# Altium PCB cjb.PcbDoc (part 2 of 2)
Units mil, origin at the board's own origin, x right, y up, seen from the top; angles counter-clockwise.
Board outline 3937.01 x 3672.01 mil, 2 copper layers (Top Layer, Bottom Layer), stack 62.8 mil thick; 137 components, 97 nets, 411 pads, 153 vias.
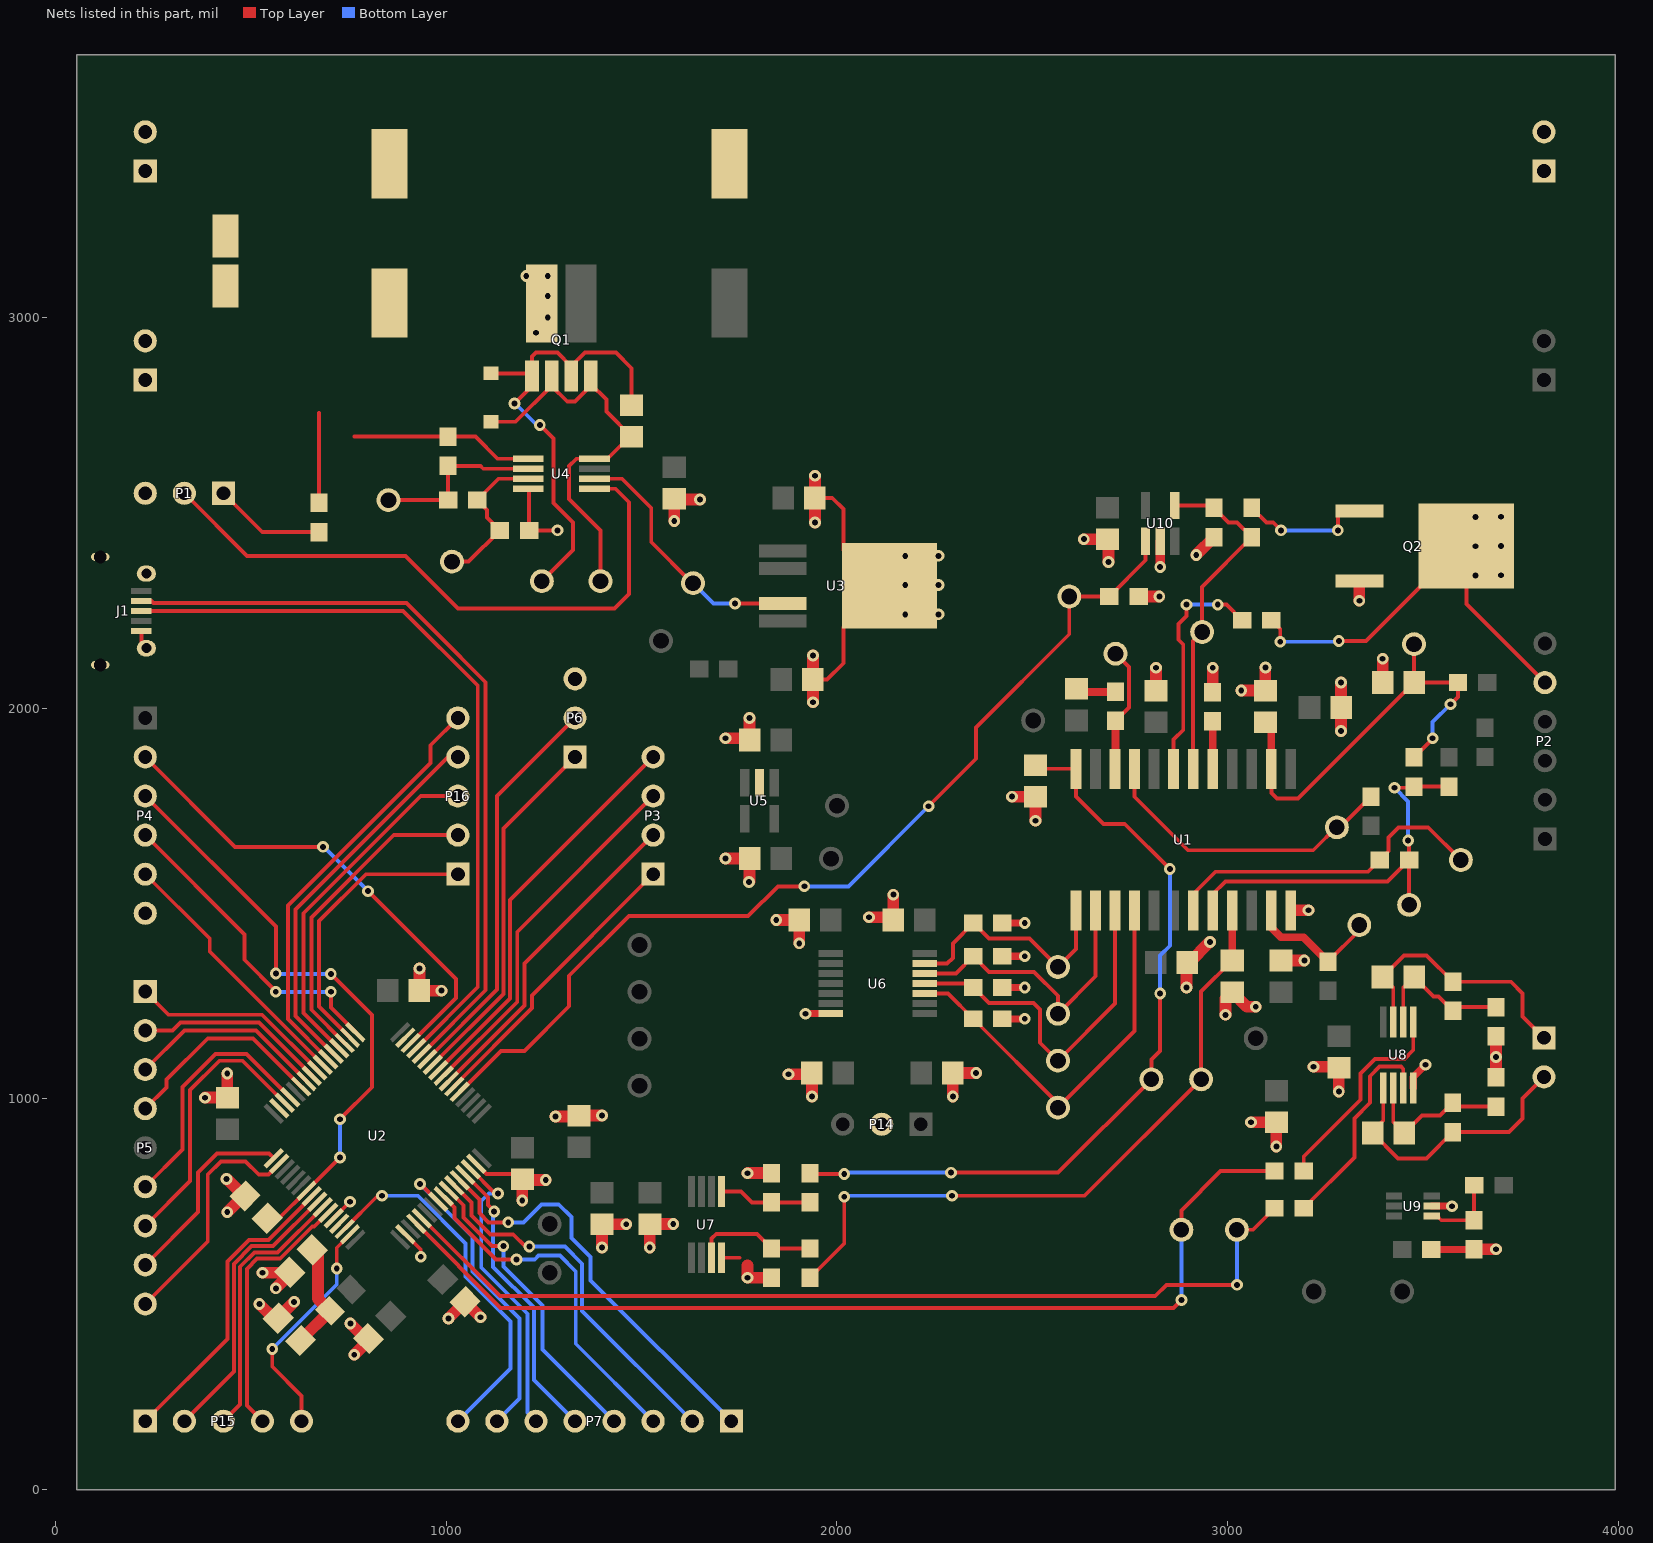
[diagram p2: the nets of this part, all layers, seen from the top]

## Via types
v1: diameter 30, hole 15, Top Layer to Bottom Layer, 153 vias

## Nets (pads, with @x,y where several pads share a name; then routed paths per layer and width w, separated by ;. In a path a pad name is that pad's centre, name@x,y a point inside that pad or via, vN(x,y) a via of type N, cw(c..) or ccw(c..) an arc to the next point about the centre after c; other vN are vias at no path point) (continued)
DAC_OUT1: R32.1 TP21.1 U2.20 | length 2565.2
  Top Layer w10: U2.20@923.83,680.9 1139.73,465 2862,465 v1(2882,485) ; TP21.1@2882,665 2882,714.5 2982.5,815 R32.1@3120.2,815
  Bottom Layer w10: v1(2882,485) TP21.1@2882,665
DAC_OUT2: R35.1 TP22.1 U2.21 | length 2441
  Top Layer w10: U2.21@937.75,694.82 1137.56,495 2815,495 2844,524 v1(3024,524) ; TP22.1@3024,665 3065.2,665 R35.1@3120.2,720
  Bottom Layer w10: v1(3024,524) TP22.1@3024,665
GND: C1.1 C2.2 C3.2 C5.2 C6.1 C7.1 C8.1 C9.1 C10.1 C11.1 C12.1 C13.1 C14.1 C15.1 C16.1 C17.2 C18.2 C19.2 C20.1 C22.1 C23.1 C24.1 C25.1 C26.2 C27.1 C28.1 C29.1 C30.1 C33.1 C34.1 C35.1 C36.1 C37.1 D1.1 J1.5 J1.6 J1.7 J1.8 J1.9 P1.3 P4.6 P6.3 P11.1 P11.2 P13.1 P13.2 P14.2 Q2.3 R1.2 R2.2 R3.2 R4.2 R9.2 R12.2 R20.2 R21.1 R23.1 R25.1 R27.1 R29.1 R31.1 R34.1 U1.24 U2.12 U2.18 U2.31 U2.47 U2.63 U3.6 U4.4 U5.2 U6.7 U7.4 U8.4 U9.2 U10.2 | length 5824.7
  Top Layer w10: J1.5@220,2197.64 220,2166.14 J1.7@232.8,2153.35 ; U2.12@712.25,694.82 v1(754.01,736.57) ; U2.18@895.99,653.06 935,614.05 v1(935,596) ; U2.31@1076.94,834.01 1103.45,807.51 1182.14,807.51 C15.1@1195,794.65 ; U4.4@1210.35,2561.61 1212.4,2559.57 R20.2@1212.4,2455 v1(1285,2455) ; U7.4@1704.74,593.36 1751.64,593.36 ; C23.1@1771.65,1923 C23.1@1776.65,1918 ; v1(1775,1555) v1@1776.65,1556.65 ; C17.2@1938.92,2073 1975,2073 2016.92,2114.92 2016.92,2206.92 U3.6@2105,2295 ; C20.1@1943.92,2538 1988.4,2538 2016.92,2509.48 U3.6@2016.92,2405 ; C2.2@2897.42,1348.8 C2.2@2902.06,1348.8 ; v1@3096.71,2103.45 v1(3097.06,2103.8)
  Top Layer w18: v1@1920.43,1218.23 U6.7@1984.92,1218.23 ; R4.2@2423.9,1205 v1(2481,1205) ; R3.2@2423.9,1285 v1(2481,1285) ; R2.2@2423.9,1365 v1(2481,1365) ; R1.2@2423.9,1450 v1(2481,1450) ; C30.1@3124.65,940 C30.1@3125,939.65 ; C29.1@3282.3,1082.34 C29.1@3285,1079.65 ; Q2.3@3337.33,2324.89 Q2.3@3337.68,2325.24 ; U8.4@3475.36,1027.7 3475.36,1055.73 v1(3506.98,1087.34) ; R12.2@3521.73,614.6 R12.2@3534.72,614.6 ; R12.2@3521.73,627.59 R12.2@3534.72,614.6 ; U9.2@3522.56,725.33 3574.02,725.33 v1(3574.33,725.02) ; R23.1@3630.66,614.6 R12.2@3534.72,614.6
  Top Layer w20: C22.1@1584,2535.65 C22.1@1585.65,2534
  Top Layer w24: v1(2827.61,2361.05) U10.2@2827.61,2426.85
  Top Layer w30: v1(383,1003) 383.35,1003.35 C13.1@440,1003.35 v1(440,1065) ; v1(437.69,795) 438.07,795 481.53,751.53 v1(440,710) ; v1(522,475) 558.47,438.53 C16.1@570.2,438.53 570.2,439.67 v1(611,480.47) ; v1(530,555) 598.74,555 601.5,552.24 v1(564.26,515) ; v1(755,425) 800,380 v1(765,345) ; v1(931.85,1333.85) C14.1@931.85,1277 v1(988.4,1277) ; v1(1006.07,438) C12.1@1048.53,480.47 v1(1088,441) ; v1(1195,740) C15.1@1195,794.65 1197.39,792.25 v1(1255,792.25) ; v1(1280,955) 1337.65,955 C10.1@1340,957.35 v1(1399,957.35) ; v1(1399,619.57) C34.1@1399,679.22 v1(1460.99,679.22) ; v1(1521.35,619.57) C33.1@1521.35,679.22 1521.71,679.57 v1(1581.35,679.57) ; v1(1584,2479) C22.1@1584,2535.65 ; C22.1@1585.65,2534 v1(1650,2534) ; v1(1715,1615) C24.1@1776.65,1615 v1@1776.65,1556.65 ; v1(1715,1923) C23.1@1771.65,1923 ; 1771.35,573.65 v1(1771.35,542.17) R27.1@1832.92,542.17 ; v1(1771.35,809.57) 1771.76,809.98 R25.1@1832.92,809.98 ; C23.1@1776.65,1918 v1(1776.65,1975) ; v1(1845,1458) C27.1@1903.57,1458 1904,1457.57 v1(1904,1398) ; v1(1876.57,1063.05) C35.1@1933,1063.05 ; v1(1936.21,1006.26) C35.1@1936.21,1059.84 ; v1(1938.92,2015) C17.2@1938.92,2073 v1(1938.92,2135) ; v1(1943.92,2475) C20.1@1943.92,2538 v1(1943.92,2595) ; v1(2082.45,1465) 2143.62,1465 2144.65,1466.02 v1(2144.65,1522.65) ; v1(2296.92,1006.26) C25.1@2296.92,1066.26 v1(2356.57,1066.26) ; v1(2448.33,1773.45) C7.1@2508.33,1773.45 v1(2508.33,1711.8) ; v1(2632.21,2432.5) C37.1@2692.61,2432.5 2695.45,2429.67 v1(2695.45,2373.85) ; R21.1@2772.32,2285.84 v1(2825.57,2285.84) ; C5.2@2817.06,2044.16 v1(2817.06,2103.45) ; v1(2895,1284.79) 2895,1346.39 C2.2@2897.42,1348.8 ; C2.2@2902.06,1348.8 v1(2955,1401.74) ; v1(2920,2392.24) R29.1@2965.35,2437.6 ; R9.2@2962.06,2041.2 v1(2962.06,2103.45) ; v1(2995,1215) 2995,1256.39 C6.1@3012.06,1273.45 3049.71,1235.8 v1(3072.06,1235.8) ; v1(3035,2045) 3095.87,2045 C3.2@3096.71,2044.16 v1@3096.71,2103.45 ; v1(3060,940) C30.1@3124.65,940 ; v1(3125,878) C30.1@3125,939.65 ; C8.1@3137.06,1354.16 v1(3196.71,1354.16) ; U1.24@3171,1482.7 v1(3207.06,1482.7) ; v1(3220,1082.34) C29.1@3282.3,1082.34 ; v1(3285,1019) C29.1@3285,1079.65 ; v1(3290.48,1941.4) C1.1@3290.48,2001.4 v1(3290.48,2065.4) ; v1(3337.33,2275) Q2.3@3337.33,2324.89 ; C26.2@3396.98,2065.4 v1(3396.98,2126.4) ; R23.1@3630.66,614.6 3631.06,615 v1(3686.98,615) ; R34.1@3686.98,1054.75 v1(3686.98,1107.34) R31.1@3686.98,1159.94
  other v1: 1920,1217.8 2175,2240.12 2260,2240.12 2175,2315 2260,2315 2175,2389.88 2260,2389.88
HEATER-: P2.5 Q2.4 R14.1 | length 1061
  Top Layer w10: R14.1@3112.4,2225 3135,2202.4 v1(3135,2170) ; v1(3285,2172.06) 3354.39,2172.06 Q2.4@3597.33,2415 ; Q2.4@3611.3,2415 3611.3,2266.43 P2.5@3812.33,2065.4
  Bottom Layer w10: v1(3135,2170) 3282.94,2170 v1(3285,2172.06)
  other v1: 3635,2339.56 3700,2340.12 3635,2414.45 3700,2415 3635,2489.33 3700,2489.88
NetC3_1: C3.1 C26.1 R10.1 R22.2 TP26.1 U1.2 | length 1130.7
  Top Layer w10: C3.1@3096.71,1963.45 C3.1@3112.06,1948.09 ; U1.2@3112.06,1844.91 3112.06,1782.67 3126.33,1768.4 3180.68,1768.4 C26.1@3477.68,2065.4 ; R10.1@3477.33,1873.8 3525,1921.47 v1(3525,1923) ; TP26.1@3477.33,2163.8 3477.68,2163.45 C26.1@3477.68,2065.4 ; v1(3570.93,2010) 3589.93,2029 R22.2@3589.93,2065.4 C26.1@3477.68,2065.4
  Top Layer w20: U1.2@3112.06,1844.91 C3.1@3112.06,1948.09
  Bottom Layer w10: v1(3525,1923) 3525,1964.07 v1(3570.93,2010)
NetC4_2: C4.2 R5.1 | length 96.6
  Top Layer w20: C4.2@2626.74,2041.2 R5.1@2723.33,2041.2
NetC21_1: C21.1 D2.2 Q1.2 Q1.4 TP32.1 U4.8 | length 1049.5
  Top Layer w10: D2.2@1115,2732.99 1177.99,2732.99 1270,2825 1310,2785 1330,2785 1370,2825 Q1.4@1370,2830 ; Q1.4@1370,2850.35 Q1.4@1370,2830 ; TP32.1@1395,2325 1395,2455 1315,2535 1315,2620 1333.39,2638.39 U4.8@1379.65,2638.39 1413.39,2638.39 1469.65,2694.65 C21.1@1475,2694.65 1410,2759.65 1410,2790 Q1.4@1370,2830
NetC21_2: C21.2 D2.1 Q1.1 Q1.3 TP31.1 | length 1226.5
  Top Layer w10: D2.1@1115,2857.01 1213.35,2857.01 Q1.1@1220,2850.35 ; v1(1175,2780) 1220,2825 Q1.1@1220,2850.35 ; v1(1240,2725) 1275,2690 1275,2525 1325,2475 1325,2405 TP31.1@1245,2325 ; Q1.3@1320,2850.35 Q1.3@1320,2875 ; C21.2@1475,2775.35 1475,2870 1435,2910 1355,2910 Q1.3@1320,2875 ; Q1.1@1220,2850.35 1220,2900 1230,2910 1285,2910 Q1.3@1320,2875
  Bottom Layer w10: v1(1175,2780) 1177.01,2780 1232.01,2725 v1(1240,2725)
NetC31_1: C31.1 R30.1 R31.2 U8.6 | length 376.7
  Top Layer w10: U8.6@3449.77,1196.99 3449.77,1284.79 C31.1@3477.33,1312.34 3527.33,1262.34 3539.57,1262.34 R30.1@3576.98,1224.94 3586.78,1234.75 R31.2@3686.98,1234.75
NetC31_2: C31.2 P8.1 R30.2 U8.7 | length 684.8
  Top Layer w10: U8.7@3424.18,1196.99 3424.18,1284.79 C31.2@3396.62,1312.34 3451.62,1367.34 3509.38,1367.34 R30.2@3576.98,1299.75 3725.25,1299.75 3755,1270 3755,1211.26 P8.1@3810,1156.26
NetC32_1: C32.1 R33.1 R34.2 U8.2 | length 397.8
  Top Layer w10: U8.2@3424.18,1027.7 3424.18,940.49 C32.1@3452.33,912.34 3497.33,957.34 3543.95,957.34 R33.1@3576.35,989.75 3586.16,979.94 R34.2@3686.98,979.94
NetC32_2: C32.2 P8.2 R33.2 U8.1 | length 710.5
  Top Layer w10: C32.2@3366.62,912.34 3398.59,944.31 U8.1@3398.59,1027.7 ; C32.2@3371.62,912.34 3436.62,847.34 3508.76,847.34 R33.2@3576.35,914.94 3719.94,914.94 3755,950 3755,1001.26 P8.2@3810,1056.26
NetP1_1: P1.1 R17.1 | length 286.2
  Top Layer w10: P1.1@430,2550 529.45,2450.55 R17.1@675,2450.55
NetP1_2: P1.2 U4.5 | length 1613.1
  Top Layer w10: P1.2@330,2550 490.12,2389.88 895.99,2389.88 1030.87,2255 1430.79,2255 1468,2292.21 1468,2527 1433.39,2561.61 U4.5@1379.65,2561.61
NetQ2_1: Q2.1 R28.2 | length 343.4
  Top Layer w10: R28.2@3062.06,2512.4 3099.46,2475 3117.06,2475 v1(3137.06,2455) ; v1(3282.33,2455) 3282.33,2494.98 3292.12,2504.76 Q2.1@3337.68,2504.76
  Bottom Layer w10: v1(3137.06,2455) v1(3282.33,2455)
NetR1_1: R1.1 TP12.1 U1.13 U6.13 | length 616.3
  Top Layer w10: U6.13@2225.08,1346.18 2282.38,1346.18 2296.92,1360.72 2296.92,1397.82 R1.1@2349.1,1450 2389.1,1410 2493.67,1410 TP12.1@2566,1337.67 2612.06,1383.73 U1.13@2612.06,1482.7
NetR2_1: R2.1 TP13.1 U1.14 U6.12 | length 752.3
  Top Layer w10: U6.12@2225.08,1320.59 2304.69,1320.59 R2.1@2349.1,1365 2389.1,1325 2505,1325 2566,1264 TP13.1@2566,1217.67 2662.06,1313.73 U1.14@2662.06,1482.7
NetR3_1: R3.1 TP14.1 U1.15 U6.11 | length 926.7
  Top Layer w10: U6.11@2225.08,1295 2339.1,1295 R3.1@2349.1,1285 2389.1,1245 2503.33,1245 2520,1228.33 2520,1143.67 TP14.1@2566,1097.67 2712.06,1243.73 U1.15@2712.06,1482.7 ; TP14.1@2570.8,1092.87 TP14.1@2570.8,1101.8
NetR4_1: R4.1 TP15.1 U1.16 U6.10 | length 1064.1
  Top Layer w10: U6.10@2225.08,1269.41 2284.69,1269.41 R4.1@2349.1,1205 2566,988.1 TP15.1@2566,977.67 2762.06,1173.73 U1.16@2762.06,1482.7 U1.16@2762.06,1492.7
NetR6_2: R6.2 TP25.1 U1.9 | length 793
  Top Layer w10: U1.9@2762.06,1844.91 2762.06,1773.17 2898.83,1636.4 3219.33,1636.4 3282.33,1699.4 3292.93,1699.4 R6.2@3367.33,1773.8 ; TP25.1@3282.33,1686.4 TP25.1@3282.33,1688.8
NetR7_2: R7.2 R8.1 R10.2 TP27.1 U1.20 | length 1026.6
  Top Layer w10: U1.20@2962.06,1492.7 2962.06,1523.8 2994.66,1556.4 3409.73,1556.4 R8.1@3464.73,1611.4 ; v1(3427.33,1796.4) 3474.73,1796.4 R10.2@3477.33,1799 R7.2@3567.33,1799 ; v1(3462.33,1661.4) 3464.73,1659 R8.1@3464.73,1611.4 ; TP27.1@3464.73,1496.4 R8.1@3464.73,1611.4
  Bottom Layer w10: v1(3427.33,1796.4) 3462.33,1761.4 v1(3462.33,1661.4)
NetR8_2: R8.2 TP28.1 U1.19 | length 842.7
  Top Layer w10: U1.19@2912.06,1492.7 2912.06,1523.8 2969.66,1581.4 3359.93,1581.4 R8.2@3389.93,1611.4 3412.33,1633.8 3412.33,1669.4 3437.83,1694.9 3513.83,1694.9 TP28.1@3597.33,1611.4
NetR9_1: R9.1 U1.5 | length 121.5
  Top Layer w20: U1.5@2962.06,1844.91 R9.1@2962.06,1966.4
NetR13_2: R13.2 R23.2 U9.1 | length 202.4
  Top Layer w10: U9.1@3522.56,699.74 3536.59,699.74 3546.93,689.4 R23.2@3630.66,689.4 3630.66,777.64 R13.2@3631.93,778.91
NetR14_2: R14.2 U1.7 | length 602.5
  Top Layer w10: U1.7@2862.06,1844.91 2862.06,1919.29 2886.61,1943.84 2886.61,2163.39 2875,2175 2875,2215.35 2895,2235.35 v1(2895,2265) ; v1(2975,2265) 2997.6,2265 R14.2@3037.6,2225
  Bottom Layer w10: v1(2895,2265) v1(2975,2265)
NetR18_2: R18.2 R19.1 TP5.1 U4.2 | length 448.8
  Top Layer w10: TP5.1@852.4,2532.4 1004.65,2532.4 R18.2@1004.65,2620.2 1087.6,2620.2 1095,2612.8 U4.2@1210.35,2612.8
NetR19_2: R19.2 R20.1 TP7.1 U4.3 | length 410.3
  Top Layer w10: TP7.1@1015,2375 1057.6,2375 R20.1@1137.6,2455 1104.65,2487.95 1104.65,2507.56 R19.2@1079.8,2532.4 1134.61,2587.2 U4.3@1210.35,2587.2
NetR24_2: R24.2 R25.2 U7.5 | length 238
  Top Layer w10: U7.5@1704.74,762.65 1755.28,762.65 1782.76,735.17 R25.2@1832.92,735.17 R24.2@1931.35,735.17
NetR26_2: R26.2 R27.2 U7.3 | length 328.8
  Top Layer w10: U7.3@1679.15,593.36 1679.15,642.37 1691.35,654.57 1795.32,654.57 R27.2@1832.92,616.98 R26.2@1931.35,616.98 R26.2@1938.28,616.98
NetR32_2: R32.2 U8.5 | length 542.4
  Top Layer w10: R32.2@3195,815 3195,852.67 3340,997.67 3340,1065 3377.34,1102.34 3452.98,1102.34 3475.36,1124.73 U8.5@3475.36,1196.99
NetR35_2: R35.2 U8.3 | length 559.7
  Top Layer w10: R35.2@3192.5,722.5 R35.2@3197.5,722.5 ; R35.2@3195,720 R35.2@3197.5,722.5 ; U8.3@3449.77,1027.7 3449.77,1076.95 3444.38,1082.34 3389.45,1082.34 3365,1057.89 3365,990 3325,950 3325,850 R35.2@3197.5,722.5
NetTP4_1: TP4.1 U3.4 U4.6 | length 666.8
  Top Layer w10: U4.6@1379.65,2587.2 1450.2,2587.2 1525,2512.4 1525,2425 1626.79,2323.21 TP4.1@1635.21,2323.21 ; v1(1739.2,2268.12) U3.4@1861.24,2268.12
  Bottom Layer w10: TP4.1@1632,2320 1683.88,2268.12 v1(1739.2,2268.12)
NRST: C9.2 P4.3 U2.7 | length 1531
  Top Layer w10: P4.3@230,1775 564.26,1440.74 v1(564.26,1320.59) ; C9.2@542.53,694.47 572.71,694.47 U2.7@642.66,764.41 v1(728.25,850.01) ; v1(705,1319.5) 810,1214.5 810,1029.75 v1(728.25,948)
  Bottom Layer w10: v1(564.26,1320.59) 565.35,1319.5 v1(705,1319.5) ; v1(728.25,850.01) v1(728.25,948)
PA0: P7.8 U2.14 | length 954.2
  Top Layer w10: U2.14@740.09,666.98 825.11,752 v1(835.75,752)
  Bottom Layer w10: v1(835.75,752) 928,752 1050,630 1050,544.81 1165,429.81 1165,310 P7.8@1030,175
PA1: P15.5 U2.15 | length 591.6
  Top Layer w10: v1(555,360) 555,315 630,240 P15.5@630,175 ; v1(720,566) 720,619.05 U2.15@754.01,653.06
  Bottom Layer w10: v1(555,360) 720,525 v1(720,566)
PA8: P3.4 U2.41 | length 1030.3
  Top Layer w10: U2.41@979.51,1073.43 980.78,1073.43 1163.79,1256.43 1163.79,1508.79 P3.4@1530,1875
PA15: P16.1 U2.50 | length 735.5
  Top Layer w10: U2.50@754.01,1156.94 675,1235.95 675,1455 795,1575 P16.1@1030,1575
PB0: P7.4 U2.26 | length 781.8
  Top Layer w10: U2.26@1007.34,764.41 1044,727.76 1044,696 1117,623 v1(1146.54,623)
  Bottom Layer w10: v1(1146.54,623) 1146.54,570.71 1246.59,470.66 1246.59,358.41 P7.4@1430,175
PB1: P7.2 U2.27 | length 948.6
  Top Layer w10: U2.27@1021.26,778.33 1065,734.6 1065,702 1113.94,653.06 1171.94,653.06 1203,622 v1(1213,622)
  Bottom Layer w10: v1(1213,622) 1303.98,622 1348,577.98 1348,457 P7.2@1630,175
PB2: P7.1 U2.28 | length 1083.8
  Top Layer w10: U2.28@1035.18,792.25 1085,742.44 1085,708 1109,684 v1(1159,684)
  Bottom Layer w10: v1@1155.13,679.13 v1@1155.13,687.87 ; v1(1159,684) 1197.94,684 1243.94,730 1288.2,730 1320.64,697.56 1320.64,644.22 1370,594.86 1370,535 P7.1@1730,175
PB4: P5.1 U2.56 | length 524
  Top Layer w10: P5.1@230,1275 289.63,1215.37 528.55,1215.37 U2.56@670.49,1073.43
PB5: P5.2 U2.57 | length 491
  Top Layer w10: P5.2@230,1175 300,1175 320,1195 521.08,1195 U2.57@656.57,1059.51
PB6: P5.3 U2.58 | length 507.7
  Top Layer w10: P5.3@230,1075 330,1175 513.24,1175 U2.58@642.66,1045.59
PB7: P5.4 U2.59 | length 536.1
  Top Layer w10: P5.4@230,975 284.46,1029.46 284.46,1049.46 390,1155 505.4,1155 U2.59@628.74,1031.67
PB8: P5.6 U2.61 | length 651.7
  Top Layer w10: P5.6@230,775 325,870 325,1030 410.18,1115.18 489.54,1115.18 U2.61@600.9,1003.83
PB9: P5.7 U2.62 | length 712.9
  Top Layer w10: P5.7@230,675 345,790 345,1022.51 420.16,1097.67 479.22,1097.67 U2.62@586.98,989.91
PB10: P7.5 U2.29 | length 749.6
  Top Layer w10: U2.29@1049.1,806.17 1107,748.27 1107,728 v1(1123,712)
  Bottom Layer w10: v1(1123,712) 1120.54,709.54 1120.54,569.96 1225,465.5 1225,280 P7.5@1330,175
PB11: P7.6 U2.30 | length 768.3
  Top Layer w10: U2.30@1063.02,820.09 1125.11,758 v1(1133,758)
  Bottom Layer w10: v1(1133,758) 1109.43,758 1090,738.57 1090,567.96 1207.96,450 1207.96,197.04 P7.6@1230,175
PC0: P15.1 U2.8 | length 781.3
  Top Layer w10: P15.1@230,175 440,385 440,583.63 495.51,639.14 545.22,639.14 U2.8@656.57,750.49
PC1: P15.2 U2.9 | length 734.8
  Top Layer w10: P15.2@330,175 456.74,301.74 456.74,577.74 502,623 556.92,623 U2.9@670.49,736.57
PC2: P15.3 U2.10 | length 687.8
  Top Layer w10: P15.3@430,175 472.74,217.74 472.74,570.37 509.37,607 568.76,607 U2.10@684.41,722.66
PC3: P15.4 U2.11 | length 674.4
  Top Layer w10: P15.4@530,175 490,215 490,565 516,591 575.39,591 657.39,673 662.6,673 U2.11@698.33,708.74
PC4: P7.7 U2.24 | length 802.1
  Top Layer w10: v1(933,782) 934.08,782 U2.24@979.51,736.57
  Bottom Layer w10: v1(933,782) 1067.93,647.07 1067.93,558.07 1188.19,437.81 1188.19,233.19 P7.7@1130,175
PC5: P7.3 U2.25 | length 907.4
  Top Layer w10: U2.25@993.42,750.49 1022,721.92 1022,695 1128,589 v1(1180,589)
  Bottom Layer w10: v1(1180,589) 1226.81,589 1236.81,599 1291,599 1331.86,558.14 1331.86,373.14 P7.3@1530,175
PC7: P3.1 U2.38 | length 754.1
  Top Layer w10: U2.38@1021.26,1031.67 1021.26,1033.54 1220,1232.28 1220,1265 P3.1@1530,1575
PC8: P3.2 U2.39 | length 845.9
  Top Layer w10: U2.39@1007.34,1045.59 1201.01,1239.25 1201.01,1346.01 P3.2@1530,1675
PC9: P3.3 U2.40 | length 937.8
  Top Layer w10: U2.40@993.42,1059.51 1182.14,1248.22 1182.14,1427.14 P3.3@1530,1775
PC10: P16.2 U2.51 | length 818.7
  Top Layer w10: U2.51@740.09,1143.02 655,1228.11 655,1464.06 865.94,1675 P16.2@1030,1675
PC11: P16.3 U2.52 | length 902.9
  Top Layer w10: U2.52@726.17,1129.1 635,1220.27 635,1475 935,1775 P16.3@1030,1775
PC12: P16.4 U2.53 | length 979.3
  Top Layer w10: U2.53@712.25,1115.18 615,1212.44 615,1485 P16.4@1017.5,1887.5
PC13: P5.9 U2.2 | length 620
  Top Layer w10: P5.9@230,475 390,635 390,806.12 423.88,840 486.74,840 520.57,806.17 545.22,806.17 U2.2@573.06,834.01
PD2: P16.5 U2.54 | length 1096.7
  Top Layer w10: U2.54@698.33,1101.26 595,1204.6 595,1495 960,1860 960,1905 P16.5@1030,1975
PWM_DRIVE: R28.1 R29.2 TP20.1 U1.6 U10.4 | length 885.5
  Top Layer w10: U10.4@2865.02,2518.85 2958.9,2518.85 R29.2@2965.35,2512.4 3002.76,2475 3024.66,2475 R28.1@3062.06,2437.6 2935,2310.54 TP20.1@2935,2195 2912.06,2172.06 U1.6@2912.06,1844.91
PWM_EN: R21.2 TP1.1 U2.37 U10.1 | length 2516.3
  Top Layer w10: U2.37@1035.18,1017.75 1072.18,1054.75 1072.4,1054.75 1140.66,1123 1201.01,1123 1315,1236.99 1315,1315 1468,1468 1773,1468 1849,1544 v1(1917,1544) ; v1(2235,1749) 2356.57,1870.57 2356.57,1950.72 2595,2189.16 TP1.1@2595,2285.84 R21.2@2697.52,2285.84 2790.21,2378.54 U10.1@2790.21,2426.85
  Bottom Layer w10: v1(1917,1544) 2030,1544 v1(2235,1749)
RF: R15.1 TP29.1 U1.23 | length 352.2
  Top Layer w10: U1.23@3112.06,1438.8 U1.23@3112.06,1482.7 ; R15.1@3257.06,1351.2 3337.33,1431.47 TP29.1@3337.33,1445
  Top Layer w20: U1.23@3112.06,1438.8 3137.06,1413.8 3194.46,1413.8 R15.1@3257.06,1351.2
RM: R5.2 TP24.1 U1.10 | length 323.1
  Top Layer w10: U1.10@2712.06,1844.91 2712.06,1888.8 U1.10@2713.33,1890.07 ; R5.2@2713.33,1967.24 2747.33,2001.24 2747.33,2105.28 TP24.1@2713.33,2139.28
  Top Layer w20: U1.10@2713.33,1890.07 R5.2@2713.33,1967.24
SWCLK: P4.4 U2.49 | length 809
  Top Layer w10: P4.4@230,1675 484,1421 484,1356 v1@565,1275 ; v1(705,1274) 705,1233.79 U2.49@767.93,1170.86
  Bottom Layer w10: v1(564,1274) v1(705,1274)
SWDIO: P4.2 U2.46 | length 1242.5
  Top Layer w10: P4.2@230,1875 460,1645 v1(685,1645) ; v1(800,1531.72) 1025,1306.72 1025,1258.11 U2.46@909.91,1143.02
  Bottom Layer w10: v1@685,1646.72 v1(800,1531.72)
SWO: P4.5 U2.55 | length 675.9
  Top Layer w10: P4.5@230,1575 395,1410 395,1376.76 U2.55@684.41,1087.34
UA: C6.2 R26.1 TP18.1 U1.21 | length 1749.1
  Top Layer w10: R26.1@1931.35,542.17 2019,629.82 v1(2019,749.57) ; v1(2295,752) 2634.4,752 TP18.1@2932.4,1050 2932.4,1274.5 C6.2@3012.06,1354.16
  Top Layer w20: C6.2@3012.06,1354.16 U1.21@3012.06,1482.7
  Bottom Layer w10: v1@2019,745 2026,752 v1(2295,752)
UART_RX: P6.2 U2.43 | length 1030.4
  Top Layer w10: U2.43@951.67,1101.26 1130,1279.6 1130,1775 P6.2@1330,1975
UART_TX: P6.1 U2.42 | length 938.6
  Top Layer w10: U2.42@965.59,1087.34 1146.54,1268.3 1146.54,1691.54 P6.1@1330,1875
UR: C7.2 R24.1 TP16.1 U1.12 | length 2031.8
  Top Layer w10: R24.1@1931.35,809.98 1933.83,807.51 v1(2019,807.51) ; v1(2292,811.12) 2566.12,811.12 TP16.1@2805,1050 2805,1100.28 2827.61,1122.9 v1(2827.61,1269.41) ; C7.2@2508.33,1854.16 2517.58,1844.91 U1.12@2612.06,1844.91 2612.06,1773.8 2682.06,1703.8 2737.06,1703.8 v1(2852.33,1588.54)
  Bottom Layer w10: v1@2018,802.93 2026.19,811.12 v1(2292,811.12) ; v1(2827.61,1269.41) 2827.61,1367.11 2852.33,1391.83 v1(2852.33,1588.54)
USB_D_N: J1.2 U2.44 | length 2164.2
  Top Layer w10: J1.2@220,2274.41 245.59,2274.41 251.18,2268.82 513.86,2268.82 750,2268.82 898.47,2268.82 1101,2066.28 ; U2.44@937.97,1114.96 1101,1277.99 1101,2066.28 ; 975.03,2192.25 1101,2066.28
USB_D_P: J1.3 U2.45 | length 1934
  Top Layer w10: J1.3@220,2248.82 251.18,2248.82 528,2248.82 750,2248.82 890.18,2248.82 1081,2058 1081,1286.27 U2.45@923.83,1129.1
VBAT: C18.1 D1.2 P10.1 P10.2 Q1.6 R17.2 R18.1 U4.1 | length 698.5
  Top Layer w10: R17.2@675,2525.35 675,2755 ; 765,2695 R18.1@1004.65,2695 1075,2695 1131.61,2638.39 U4.1@1210.35,2638.39
  other v1: 1230,2961 1260,3000 1260,3055 1205,3106 1260,3106
VBAT_U: P5.8 U2.1 | length 511.4
  Top Layer w10: P5.8@230,575 365,710 365,811.12 413.88,860 547.07,860 U2.1@559.14,847.93
VDDA: C16.2 C36.2 L1.2 U2.13 | length 282.3
  Top Layer w30: C16.2@627.27,381.47 627.27,382.27 L1.2@702.93,457.93 671.97,488.88 671.97,598.83 C36.2@657.27,613.53
pads on no net: J1.1 J1.4 U2.3 U2.4 U2.5 U2.6 U5.4 U6.6 U6.9

## Polygon pours and split planes (outlines as drawn)
VBAT on Top Layer "Top Layer-VBAT" (solid, pour order 18): 71.35,2638.91 396.35,2638.91 396.35,3138.91 71.35,3138.91
12V on Top Layer "Top Layer-12V" (solid, pour order 16): 3649.83,2635 3974.83,2635 3974.83,3137.95 3649.83,3137.95
GND on Top Layer "Top Layer-GND" (solid, pour order 14): 3649.83,3155 3974.83,3155 3974.83,3655 3649.83,3655
GND on Top Layer "Top Layer-GND 1" (solid, pour order 12): 71.53,3154.53 396.53,3154.53 396.53,3654.53 71.53,3654.53
no net on Top Layer "Top Layer-No Net" (solid, pour order 8): 75,3395
no net on Top Layer "Top Layer-No Net 1" (solid, pour order 6): 75,3655
GND on Bottom Layer "Bottom Layer-GND" (solid, remove dead copper, pour order 4): 70,15 3975,15 3975,3655 70,3655

## Other copper
Top Layer:
  rectangle net GND: 2011.4,2202.4 2292,2425
  rectangle net GND: 1715,3475 1739.2,3505
  rectangle net 12V: 1715,2925 1740,2955
  rectangle net 12V: 1650,3020.35 1695,3050.35
  rectangle net 12V: 1755,3021.85 1800,3051.85
  rectangle net GND: 1760,3378.15 1805,3408.15
  rectangle net GND: 1660,3378.15 1705,3408.15
  rectangle net GND: 420,3250 450,3280
  rectangle net VBAT: 425,3005 450,3035
  rectangle net VBAT: 843,2930 865.75,2960
  rectangle net GND: 845,3475 870,3505
  rectangle net GND: 895,3390 940,3420
  rectangle net GND: 777.07,3390 822.07,3420
  rectangle net VBAT: 895,3015 940,3045
  rectangle net VBAT: 780,3015 825,3045
  rectangle net VBAT: 365,3065 410,3095
  rectangle net VBAT: 455,3065 500,3095
  rectangle net GND: 450,3200 495,3230
  rectangle net GND: 370,3200 415,3230
  rectangle net 12V: 3182.33,1989.4 3237.33,2695
  rectangle net 12V: 1780,2635 2020,3137.95
  rectangle net GND: 2160,3155 2430,3655
  rectangle net GND: 2320,3155 3701,3655
  rectangle net GND: 1590,3495 1860,3655
  rectangle net GND: 1780,3155 2210,3655
  rectangle net 12V: 1915,2635 3689,3137.95
  rectangle net GND: 695,3495 1020,3655
  rectangle net GND: 475,3155 800,3655
  rectangle net VBAT: 295,2638.91 620,3020
  rectangle net GND: 280,3270 605,3655
  rectangle net VBAT: 475,2638.39 800,3135
  rectangle net GND: 910,3155 1670,3655
  region net GND: 1786,568 1786,582 1770,598 1737,598 1737,596.5 1742,591.5 1757,574
  region: 880,1213
  region net 3V3: 824,1269 824,1240 847,1217 855,1217 878,1240 878,1253
  region net 5V: 2700,2540 2729,2540 2752,2517 2752,2508 2730,2486 2704,2486
  region net 5V: 2198,1435 2198,1426 2220,1404 2229.5,1404 2253,1427.5 2253,1441
  region net 3V3: 1957,1434 1957,1427 1980,1404 1990,1404 2012,1426 2012,1433
  region net 5V: 2225.35,1363 2134,1363 2151,1380 2220,1380
  region net 3V3: 2004,1363 2043,1363 2047,1359 2081,1359 2060,1380 2007,1380
  region net 3V3: 3358,616.98 3358,660 3368,670 3366.5,671.5 3358.5,671.5 3328,641 3330.17,638.83 3330.17,617.83
  region net 3V3: 3426,691 3389,691 3320.5,622.5 3308,635 3381,708 3431,708
  region net 3V3: 454,950 473,950 512,927 513,918 474,895 458,895
  region net 3V3: 1166,902 1118.28,875.35 1130,871 1165.07,847.93 1174,847.93 1174,893 1181,900
  region net 12V: 1410,3120 1410,3106.02 1508.91,3007.11 1475,3135.35
  region net VBAT: 1107.6,3135 1180,3120 1186.5,3113.5 1100,3027 1100,2980
  region net VDDA: 709.94,673 689,656 654.94,653.06 641.94,640 682.94,598 683.94,599 696.94,612 699,642.5 715.94,663
  region net 3V3: 944.71,639 993.5,591.5 993.5,554.5 973.5,534.5 952.45,534.5 953.5,556.5 953.5,573.5 961,581 961,607.51 945,625
  region net GND: 559,998 526,1031 455,1031 455,977.49 456.5,975.99 500.99,975.99 522,997 543.5,997 547.5,993
  region: 492,974
  region net GND: 897,1166 920,1191 904,1232 904,1258.8 914.2,1269 959,1269 959,1227 959,1222 955.73,1208.73 922,1175
  region net 3V3: 626,918 614,921 582,948 565,948 584,921 592,907 611,888 635,888
  region net 3V3: 861,1114 862.92,1117.83 861.94,1139.32 871,1152 862,1159 838,1135 838,1111
  region net 3V3: 895.99,688 891,695 891,721 881,731 876,726 862,726 862,707 872,695 887,682
  region net 5V: 2799.33,1508.8 2825.33,1508.8 2825.33,1545.8 2824.33,1546.8 2816.76,1570.24 2792.25,1601.77 2766.64,1620.36 2732.89,1620.36 2713.33,1600.8 2745.33,1568.8 2745.33,1566.8 2779.2,1566.8 2796.26,1549.74
  region net 5V: 1858.21,2098
  region net 3V3: 1885.35,1653.24 1851.35,1682.56 1851.35,1726.51 1828.35,1715.87 1828.35,1640 1885.35,1621.24
  region net GND: 1750,1609.76 1750,1640 1788,1678 1788,1853 1749,1888 1753,1928 1804,1899 1815,1873 1815,1646 1788,1593
  region: 1909,1560
  region net 12V: 1795.51,2635.35 1599,2635.35 1580,2835
  region net 12V: 2020,2635.35 1774.65,2635.35 1630,2780 1630,2937.56 2020,2937.56
  region net 12V: 1475,3135.35 1475,2935 1670.16,2739.84 1670.16,3135.28
  region net VBAT: 675,2638.39 803.39,2638.39 1107.6,2942.6 1107.6,3135 910,3135 910,2942.6 675,2942.6
Bottom Layer:
  rectangle net HEATER-: 3615,2320 3720,2510
  rectangle net VBAT: 1161.89,2930 1290.09,3140
  rectangle net 12V: 1305,2930 1433.19,3140

## Silkscreen, mask and mechanical layers (free items; w line width, h text height)
Top Overlay:
  rectangle: 2760,15 3385,345
  text "GND" at 3605,3415.07 h36
  text "GND" at 320,3410 h36
  text "VBAT" at 325,2880.07 h36
  text "12V" at 3620,2879.53 h36
  text "H+" at 3895,2145 h36
  text "GND" at 1159,2060 h36
  text "H-" at 3895,2049.16 h36
  text "PD2" at 860,1960 h36
  text "RX" at 1190,1960 h36
  text "3V3" at 306.57,1952.86 h36
  text "VS" at 3895,1948.09 h36
  text "PA8" at 1445,1945 h36
  text "PC12" at 830,1860 h36
  text "SWDIO" at 305,1855 h36
  text "TX" at 1190,1854.16 h36
  text "IP" at 3895,1844.76 h36
  text "PC11" at 838,1765 h36
  text "NRST" at 310,1755 h36
  text "PC9" at 1361,1755 h36
  text "RC" at 3895,1742.4 h36
  text "PC10" at 825,1665 h36
  text "SWCLK" at 305,1655 h36
  text "PC8" at 1360,1655 h36
  text "VM" at 3895,1645 h36
  text "PA15" at 820,1570 h36
  text "PC7" at 1361,1556.65 h36
  text "SWO" at 305,1555 h36
  text "GND" at 305,1455 h36
  text "PB4" at 300,1253.3 h36
  text "PB5" at 300,1155.5 h36
  text "DAC1" at 3925,1135 h36 r90
  text "PB6" at 300,1060 h36
  text "PB7" at 300,935 h36
  text "DAC2" at 3925,935 h36 r90
  text "BOOT0" at 155,795 h36 r90
  text "PB8" at 300,755 h36
  text "PB9" at 300,656 h36
  text "VRC" at 300,554.5 h36
  text "PC13" at 300,450 h36
  text "PA0" at 1045,255 h36 r90
  text "PC4" at 1150,255 h36 r90
  text "PB11" at 1250,255 h36 r90
  text "PB10" at 1345,255 h36 r90
  text "PB0" at 1450,255 h36 r90
  text "PC5" at 1545,255 h36 r90
  text "PB1" at 1647.6,255 h36 r90
  text "PC0" at 170,250 h36
  text "PC1" at 355,250 h36 r90
  text "PC2" at 450,250 h36 r90
  text "PC3" at 535,250 h36 r90
  text "PA1" at 598.74,250 h36
  text "PB2" at 1750,250 h36 r90
  text "CJB-REV-A" at 2395,175 h36
  text "Kyle Bernier / Daeghan Elkin" at 3440,110 h36
Bottom Overlay:
  text "UV" at 803.39,2515 h36
  text "GATE" at 1459.46,2374.55 h36
  text "5V_EN" at 1715,2370 h36
  text "OV" at 965.59,2360 h36
  text "PWM" at 2645,2330 h36
  text "SOURCE" at 1315,2240.12 h36
  text "PWM_DRIVE" at 3285,2200 h36
  text "RM" at 2747.33,2185 h36
  text "3V3_EN" at 1655,2092.6 h36
  text "UN" at 3510,2085 h36
  text "CM" at 2535,2015 h36
  text "5V" at 1950,1735 h36
  text "RS" at 3310,1615 h36
  text "3V3" at 1945,1600 h36
  text "US" at 3625,1530 h36
  text "UC_SPI_SCK" at 1440,1420 h36
  text "UP" at 3495,1415 h36
  text "RF" at 3362.5,1365 h36
  text "CJ_SPI_SCK" at 2450,1320.59 h36
  text "UC_SPI_MISO" at 1440,1310 h36
  text "CJ_SPI_MISO" at 2448.33,1195 h36
  text "UC_SPI_MOSI" at 1435,1185 h36
  text "CF" at 3175,1135 h36
  text "CJ_SPI_MOSI" at 2495,1095 h36
  text "UC_SPI_SEL" at 1435,1020 h36
  text "UA_PRE" at 3180,1019 h36
  text "UR_PRE" at 2886.61,970 h36
  text "CJ_SPI_SEL" at 2600,880 h36
  text "UR_POST" at 1525,716.5 h36
  text "DAC1" at 2905,710 h36
  text "DAC2" at 3090,708 h36
  text "12V_BUF_EN" at 3630,555 h36
  text "UA_POST" at 1554.65,530 h36
  text "12V_ADC" at 3330.17,425 h36
Mechanical 1:
  the board outline again, w10

## Text inside footprints (layer, text, board x,y; h text height)
J1: Mechanical 1 "PCB EDGE" at 79.25,2020.47 h36 r270